# EAGLE board rgbsaber_periph1_v1.0 (EAGLE 5.10)
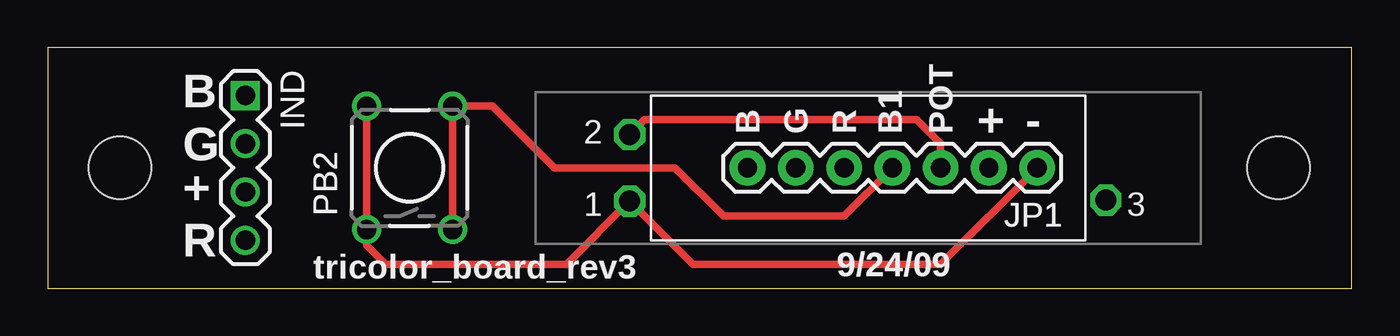
[diagram p0: board, top side]
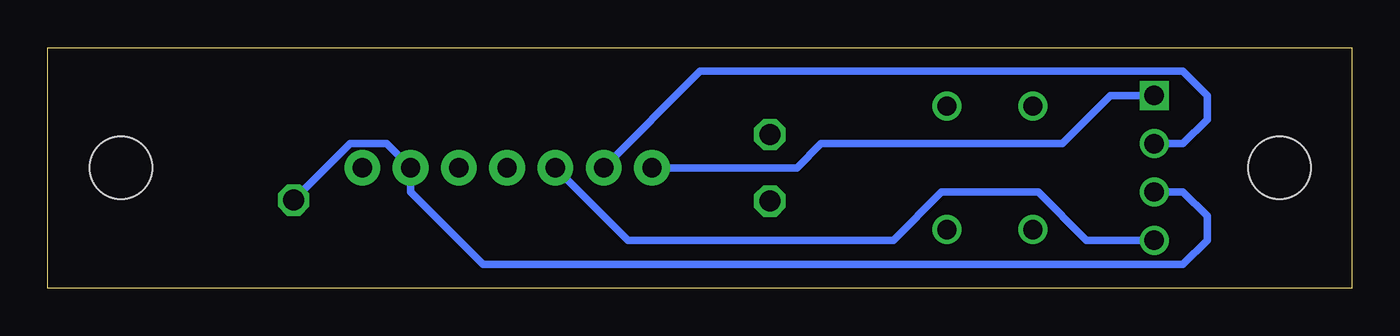
[diagram p1: board, bottom side, seen from below]

Size 68.63 x 12.69 mm. Coordinates in mm from the lower left corner, seen from the top.
Outline: 0,0 68.63,0 68.63,12.69 0,12.69 0,0
Copper layers (1*16): Top 0.035mm / dielectric 1.5mm / Bottom 0.035mm
Design rules "default": minimum track width 10mil, minimum drill 24mil, track to track 8mil, track to pad 8mil, pad to pad 8mil, via to via 8mil, smd to smd 8mil, copper to edge 40mil, drill to drill 8mil, minimum pad ring 10mil, minimum via ring 8mil, stop-mask expansion 4mil, vias tented up to drill 0mil, thermal gap 10mil

## Footprints (pad centres in the part's own frame; a part is rotated, then mirrored left to right if it is on the bottom)
SLIDER-CUSTOM = drill 1.1 octagon: P$1 -12.5,1.7; P$2 12.55,1.75; P$3 12.55,-1.75
1X04 = drill 1.016 square: 1 0,0 | drill 1.016 round: 2 2.54,0; 3 5.08,0; 4 7.62,0
1X07 = drill 1.016 pad 1.88 round: 1 0,0; 2 2.54,0; 3 5.08,0; 4 7.62,0; 5 10.16,0; 6 12.7,0; 7 15.24,0
TACTILE-PTH = drill 1.016 round: 1 -3.251,2.261; 2 3.251,2.261; 3 -3.251,-2.261; 4 3.251,-2.261
STAND-OFF = hole 3.302: 0,0

## Placement (x,y rotation side)
ADJUST  SLIDERV1  [SLIDER-CUSTOM]  43.18,6.35 180 top
IND  [1X04]  10.41,10.16 270 top
JP1  [1X07]  52.07,6.35 180 top
PB2  [TACTILE-PTH]  19.05,6.35 90 top
U$5  [STAND-OFF]  3.81,6.35 0 top
U$6  [STAND-OFF]  64.77,6.35 0 top

## Library data of the parts
ADJUST = purduecer
IND JP1 PB2 U$5 U$6 = SparkFun

## Nets
BLUE: IND.1 JP1.7
GREEN: IND.2 JP1.6
PB_0: JP1.4 PB2.3 PB2.4
PWR: ADJUST.P$1 IND.3 JP1.2
RED: IND.4 JP1.5
SLIDE: ADJUST.P$3 JP1.3
VSS: ADJUST.P$2 JP1.1 PB2.1 PB2.2

## Tracks (layer width: path | path; a pad name or v marks a point on that pad's centre or on a via)
BLUE
  Bottom 0.406: IND.1 12.7,10.16 15.24,7.62 27.94,7.62 29.21,6.35 JP1.7
GREEN
  Bottom 0.406: IND.2 8.89,7.62 7.62,8.89 7.62,10.16 8.89,11.43 34.29,11.43 JP1.6
PB_0
  Top 0.406: PB2.3 PB2.4 23.42,9.6 26.67,6.35 33.02,6.35 35.56,3.81 41.91,3.81 JP1.4
PWR
  Bottom 0.406: ADJUST.P$1 52.71,7.62 50.8,7.62 JP1.2 49.53,5.08 45.72,1.27 8.89,1.27 7.62,2.54 7.62,3.81 8.89,5.08 IND.3
RED
  Bottom 0.406: IND.4 13.97,2.54 16.51,5.08 21.59,5.08 24.13,2.54 38.1,2.54 JP1.5
SLIDE
  Top 0.406: JP1.3 46.99,7.62 45.72,8.89 31.42,8.89 ADJUST.P$3
VSS
  Top 0.406: PB2.2 PB2.1 16.79,2.26 17.78,1.27 27.3,1.27 ADJUST.P$2 33.96,1.27 46.99,1.27 JP1.1

## Text on the board
tPlace: B | B | G | R | B1 | POT | + | - | G | + | R | tricolor_board_rev3 | 9/24/09 | 9/24/09
_tNames: IND | IND | JP1 | JP1 | PB2 | PB2